# Altium PCB Pranus_TH_PCB_2015年3月30日.PcbDoc
Units mm, origin at the board's own origin, x right, y up, seen from the top; angles counter-clockwise.
Board outline 17.78 x 13.21 mm, 2 copper layers (Top Layer, Bottom Layer), stack 1.671 mm thick; 6 components, 4 nets, 22 pads, 6 vias.
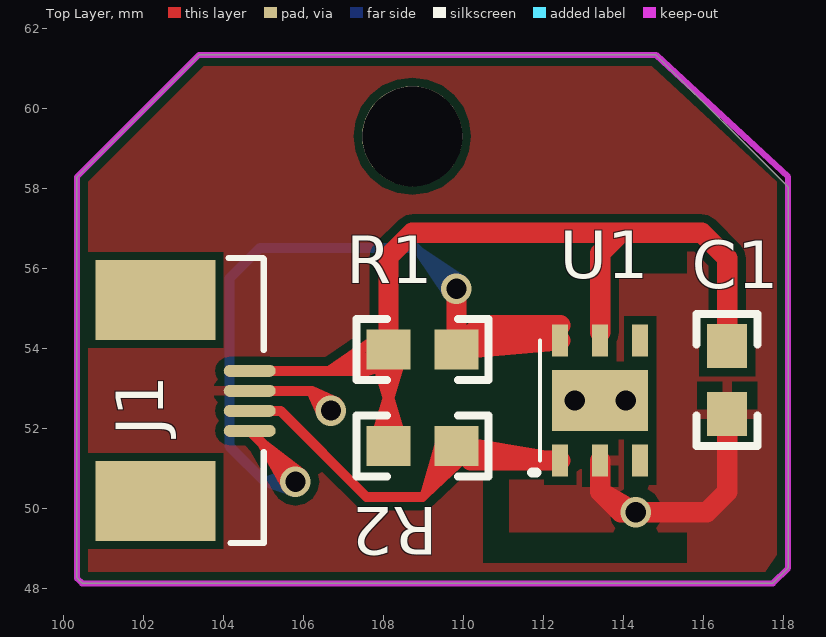
[diagram p0: Top Layer view]
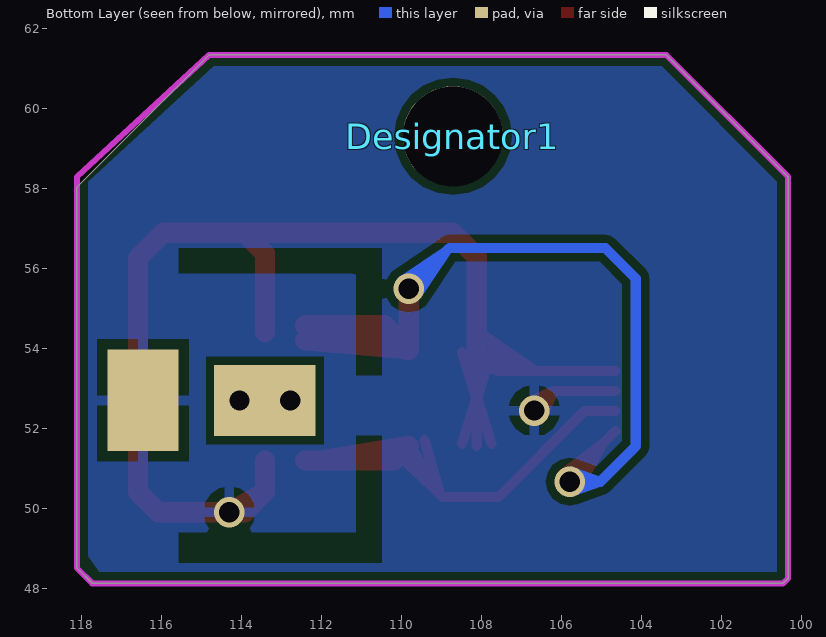
[diagram p1: Bottom Layer view, seen from below]

## Layer stack, top to bottom
Top Layer: signal copper 0.0356
Dielectric: core 1.6, FR-4, Dk 4.8
Bottom Layer: signal copper 0.0356

## Board outline
100.33,48.26 100.457,48.133 117.729,48.133 118.11,48.514 118.11,58.039 114.808,61.341 103.378,61.341 100.33,58.293

## Design rules (kind name [scope] priority, off if disabled: settings)
Clearance "6mil Special" [(HasFootprint('FPC 0.5mm 4P') OR HasFootprint('FPC 0.5mm 16P'))] p1: gap=0.152
Clearance "8mil all" [All] p2: gap=0.203
ComponentClearance [All] p1: gap=0 collisioncheckmode=3 verticalgap=0.254 showdistances=FALSE
Height [All] p1: minheight=0 maxheight=50.8 prefheight=12.7
HoleSize [All] p1: absolutevalues=TRUE maxlimit=25.4 minlimit=0.025 maxpercent=80.000 minpercent=20.000
HoleToHoleClearance [All] p1: gap=0.203 allowstackedmicrovias=TRUE
MinimumSolderMaskSliver [All] p1: minsoldermaskwidth=0
PolygonConnect [All] p1: connectstyle=Relief reliefconductorwidth=0.254 reliefentries=4 polygonreliefangle="90 Angle" airgapwidth=0.254
RoutingCorners [All] p1: cornerstyle=45-Degree minsetback=0.254 maxsetback=2.54
RoutingVias [All] p1: holewidth=0.356 width=0.508 viastyle="Through Hole" minholewidth=0.356 minwidth=0.508 maxholewidth=2.54 maxwidth=5.08
SilkToSilkClearance [All] p1: silktosilkclearance=0.203
SilkToSolderMaskClearance [IsPad] p1: minsilkscreentomaskgap=0 clearancetoexposedcopper=TRUE
SolderMaskExpansion [All] p1: expansion=0.102
Width 20mil_Power [(InNet('EP_SUPPLY&VBAT') OR InNet('PSUPPLY') OR InNet('P_3.3V') OR InNet('PSUPPLYBAT') OR InNet('P_3.3V') OR InNet('P_5V'))] p1: maxlimit=25.4 minlimit=0.203 preferedwidth=0.508
Width 8mil_Basic [All] p2: maxlimit=0.508 minlimit=0.203 preferedwidth=0.254
20 further rules are at their usual default settings.

## Classes and differential pairs
component class zigbee-board-V1: C1 J1 R1 R2 U1

## Components (designator, comment, footprint, x,y, rotation, side; value= is the part's Value field where it differs from the comment)
C1 "1uF" C1608[0603]N 116.586,53.213 r90 top
Designator1 "Comment" 2.5MM 108.712,59.309 r180 bottom
J1 "HTU20" FFC-4A 104.648,51.943 r90 top
R1 "10k" R1608[0603] 108.966,53.975 r0 top
R2 "10k" R1608[0603] 108.966,51.562 r0 top
U1 "SHT21" SHT21 113.411,52.705 r0 top

## Footprints (in the part's own frame and the unit in brackets; to place one, negate y for a bottom-side part, rotate by r counter-clockwise, add the part's x,y. Pads: shape width x height; smd on the part's side, far side on the other; paste and mask are expansions set on the pad)
2.5MM [mm]
  round 2.5 hole 2.5: 1(0,0)
C1608[0603]N [mm] "Chip Capacitor; Body 1.6 x 0.8 mm (Lx"
  rect 1.1x1 smd: 1(-0.85,0) 2(0.85,0)
  silkscreen extent -1.65,-0.76 1.65,0.76, body extent -0.8,-0.4 0.8,0.4, height 0.8
FFC-4A [mm]
  rect 2x3 smd: 0(-1.75,2.35) 0(3.275,2.35)
  oval 0.3x1.3 smd: 1(0,0) 2(0.5,0) 3(1,0) 4(1.5,0)
  silkscreen extent -2.8,-0.35 4.33,0.53
R1608[0603] [mm] "Chip Capacitor; Body 1.6 x 0.8 mm (LxW typ)"
  rect 1.1x1 smd: 1(-0.85,0) 2(0.85,0)
  silkscreen extent -1.65,-0.76 1.65,0.76, body extent -0.8,-0.4 0.8,0.4, height 0.5
SHT21 [mm]
  rect 2.4x1.524 smd: 0(0,0)
  rect 0.4x0.8 smd: 1(-1,-1.5) 2(0,-1.5) 3(1,-1.5) 4(1,1.5) 5(0,1.5) 6(-1,1.5)
  silkscreen extent -1.7,-1.8 -1.5,1.5

## Part data
C1: library part CAP, "贴片无极性电容"
J1: library part CON4
R1 R2: library part RES1

## Free pads (board coordinates)
  rect 2.54x1.778 smd far side: 0(113.411,52.705)
  rect 1.778x2.54 smd far side: 1(116.459,52.705)

## Via types
v1: diameter 0.762, hole 0.508, Top Layer to Bottom Layer, 6 vias

## Nets (pads, with @x,y where several pads share a name; then routed paths per layer and width w, separated by ;. In a path a pad name is that pad's centre, name@x,y a point inside that pad or via, vN(x,y) a via of type N, cw(c..) or ccw(c..) an arc to the next point about the centre after c; other vN are vias at no path point)
GND: C1.1 J1.3 pad.1 U1.2 | length 16.7
  Top Layer w0.254: J1.3 106.188,52.943 ; J1.3@105.148,52.943 106.06,52.943 ; v1@106.471,52.307 106.188,52.943 ; v1@106.553,52.578 106.188,52.943 ; v1(106.68,52.451) 106.188,52.943 ; v1@106.824,52.66 106.188,52.943
  Top Layer w0.508: U1.2@113.411,51.005 113.411,50.419 ; U1.2 113.411,50.419 ; C1.1@116.586,52.313 116.586,50.419 ; C1.1 116.586,50.419 ; 113.411,50.419 113.919,49.911 116.078,49.911 ; 113.411,50.419 v1(114.3,49.911) 116.078,49.911 ; 116.078,49.911 116.586,50.419
HTUDAT: J1.2 R2.2 U1.1 | length 16.5
  Top Layer w0.254: J1.2 105.418,52.443 ; R2.2@109.425,51.712 109.034,50.36 ; R2.2@109.766,51.562 109.034,50.36 ; R2.2 109.816,51.142 108.966,50.292 107.569,50.292 105.418,52.443 ; R2.2@110.056,51.327 109.034,50.36 ; 105.418,52.443 105.148,52.443 105.418,52.443
  Top Layer w0.508: R2.2 110.173,51.205 U1.1 ; R2.2@109.866,51.562 112.038,51.205
HTUSCK: J1.1 R1.2 U1.6 | length 36
  Top Layer w0.254: J1.1 105.791,50.8 v1(105.791,50.673) 104.95,51.641 ; v1@105.584,50.526 104.95,51.641 ; v1@105.965,50.858 104.95,51.641
  Top Layer w0.508: v1(109.816,55.499) R1.2 110.427,54.586 ; 112.071,54.586 R1.2@109.866,53.975 ; U1.6@112.411,54.586 110.427,54.586 ; R1.2@109.866,53.975 110.427,54.586 ; R1.2@109.866,53.975 110.427,54.586 ; R1.2@109.866,53.975 U1.6 110.49,54.586 R1.2@109.866,53.975
  Bottom Layer w0.254: v1@105.749,50.423 105.029,50.673 ; v1@105.749,50.923 105.029,50.673 ; v1(105.791,50.673) 105.029,50.673 ; v1@109.62,55.338 108.896,56.419 v1@109.977,55.695 ; v1(109.816,55.499) 108.8,56.515 104.902,56.515 104.14,55.753 104.14,51.562 105.029,50.673
VDD: C1.2 J1.4 R1.1 R2.1 U1.5 | length 40.7
  Top Layer w0.254: J1.4 107.584,53.443 ; J1.4@105.148,53.443 106.06,53.443 ; R2.1@107.747,51.617 108.116,52.824 R2.1@108.485,51.617 ; R1.1@107.747,53.92 108.116,52.713 R1.1@108.485,53.92 ; R1.1@107.893,54.306 106.645,53.443 ; R2.1 R1.1 107.584,53.443 ; R1.1@108.153,53.612 106.645,53.443 ; 106.645,53.443 R1.1@108.066,53.975 ; 107.584,53.443 108.268,53.661 107.584,53.443 ; 107.584,53.443 107.734,54.145 107.584,53.443 ; 107.584,53.443 R1.1@108.066,53.975 ; 107.584,53.443 R1.1@108.066,53.975
  Top Layer w0.508: R1.1 108.116,56.3 108.712,56.896 113.919,56.896 ; U1.5@113.411,54.405 113.411,56.129 ; U1.5@113.411,54.586 113.411,56.388 113.919,56.896 ; C1.2 116.586,56.261 115.951,56.896 113.919,56.896 ; C1.2@116.586,54.113 116.586,56.137
pads on no net: Designator1.1 J1.0 U1.0 U1.3 U1.4
copper on no net:
  other v1: 112.776,52.705 114.046,52.705

## Polygon pours and split planes (outlines as drawn)
GND on Bottom Layer "Bottom Layer-No Net" (solid, remove dead copper, pour order 7): 100.33,62.103 100.33,48.312 100.457,48.133 117.348,48.133 118.11,49.208 118.11,61.387 117.602,62.103 100.33,62.103
GND on Top Layer "Bottom Layer-No Net" (solid, remove dead copper, pour order 9): 100.33,62.487 100.33,48.322 100.457,48.133 102.108,48.133 117.348,48.133 118.11,49.266 118.11,62.11 117.602,62.865

## Keep-outs
Keep-Out Layer:
  lines w0.152: 100.33,48.26 100.33,58.293 103.378,61.341 114.808,61.341 118.11,58.293 118.11,48.514 117.729,48.133 100.457,48.133 100.33,48.26

## Other copper
Top Layer:
  pour cut-out: 110.49,53.34 111.125,53.34 111.125,55.845 111.252,55.88 115.57,55.88 115.57,56.515 110.49,56.515
  pour cut-out: 110.49,51.816 111.125,51.816 111.125,49.403 115.57,49.403 115.57,48.641 110.49,48.641
Bottom Layer:
  pour cut-out: 110.49,53.34 111.125,53.34 111.125,55.845 111.252,55.88 115.57,55.88 115.57,56.515 110.49,56.515
  pour cut-out: 110.49,51.816 111.125,51.816 111.125,49.403 115.57,49.403 115.57,48.641 110.49,48.641